# Altium PCB NumatoShieldWithVias.PcbDoc (part 1 of 4)
Units mil, origin at the board's own origin, x right, y up, seen from the top; angles counter-clockwise.
Board outline 5000 x 5000 mil, 4 copper layers (Top Layer, Mid-Layer 1, Mid-Layer 2, Bottom Layer); 8 components, 163 nets, 352 pads, 43 vias.
Unrouted connection lines stored in the file: 11.
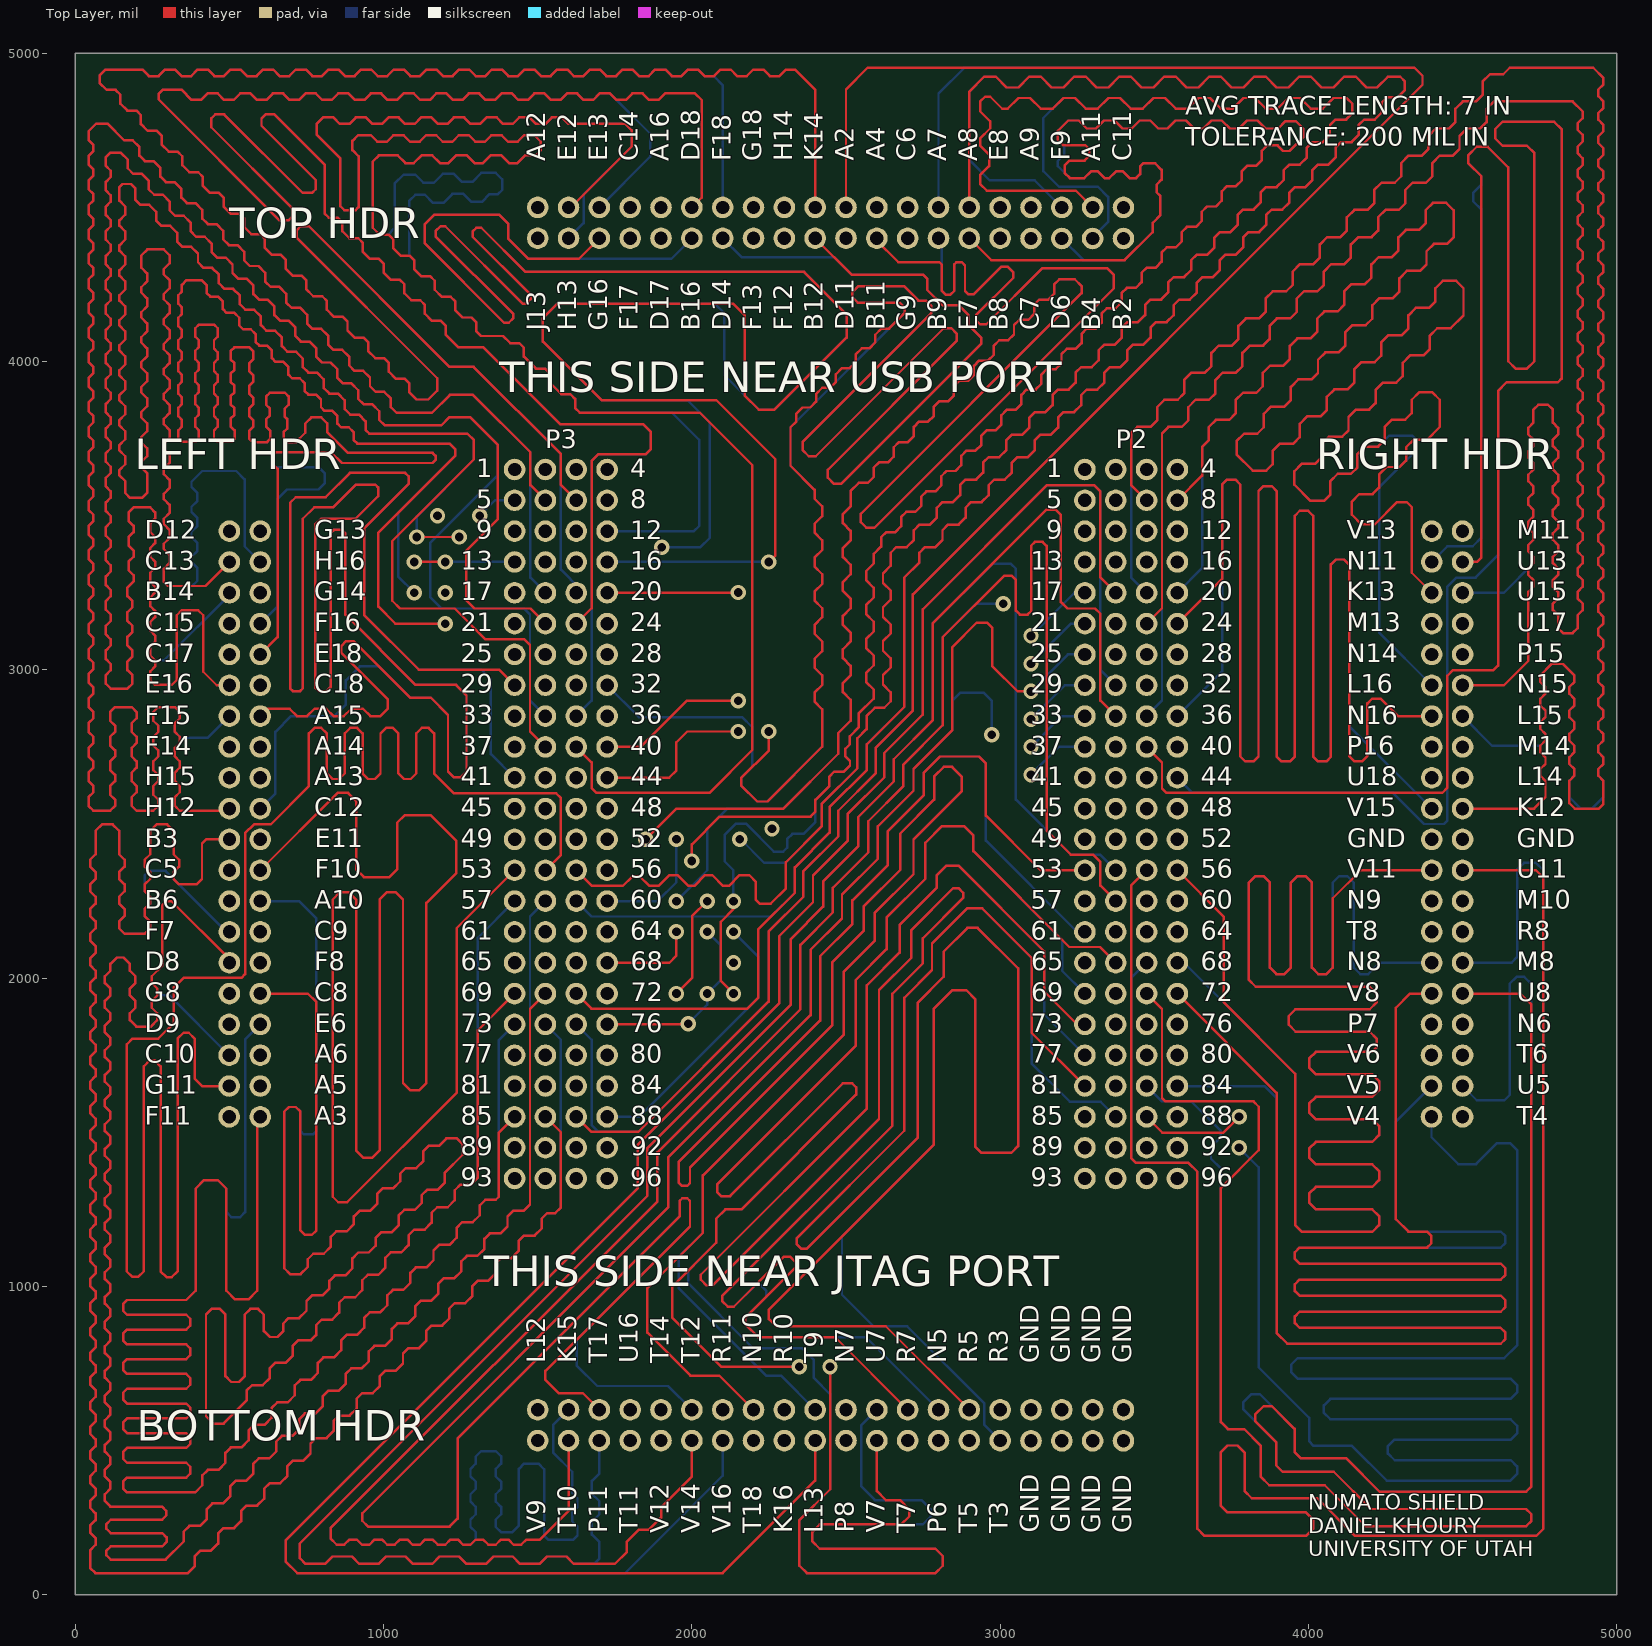
[diagram p0: Top Layer view]
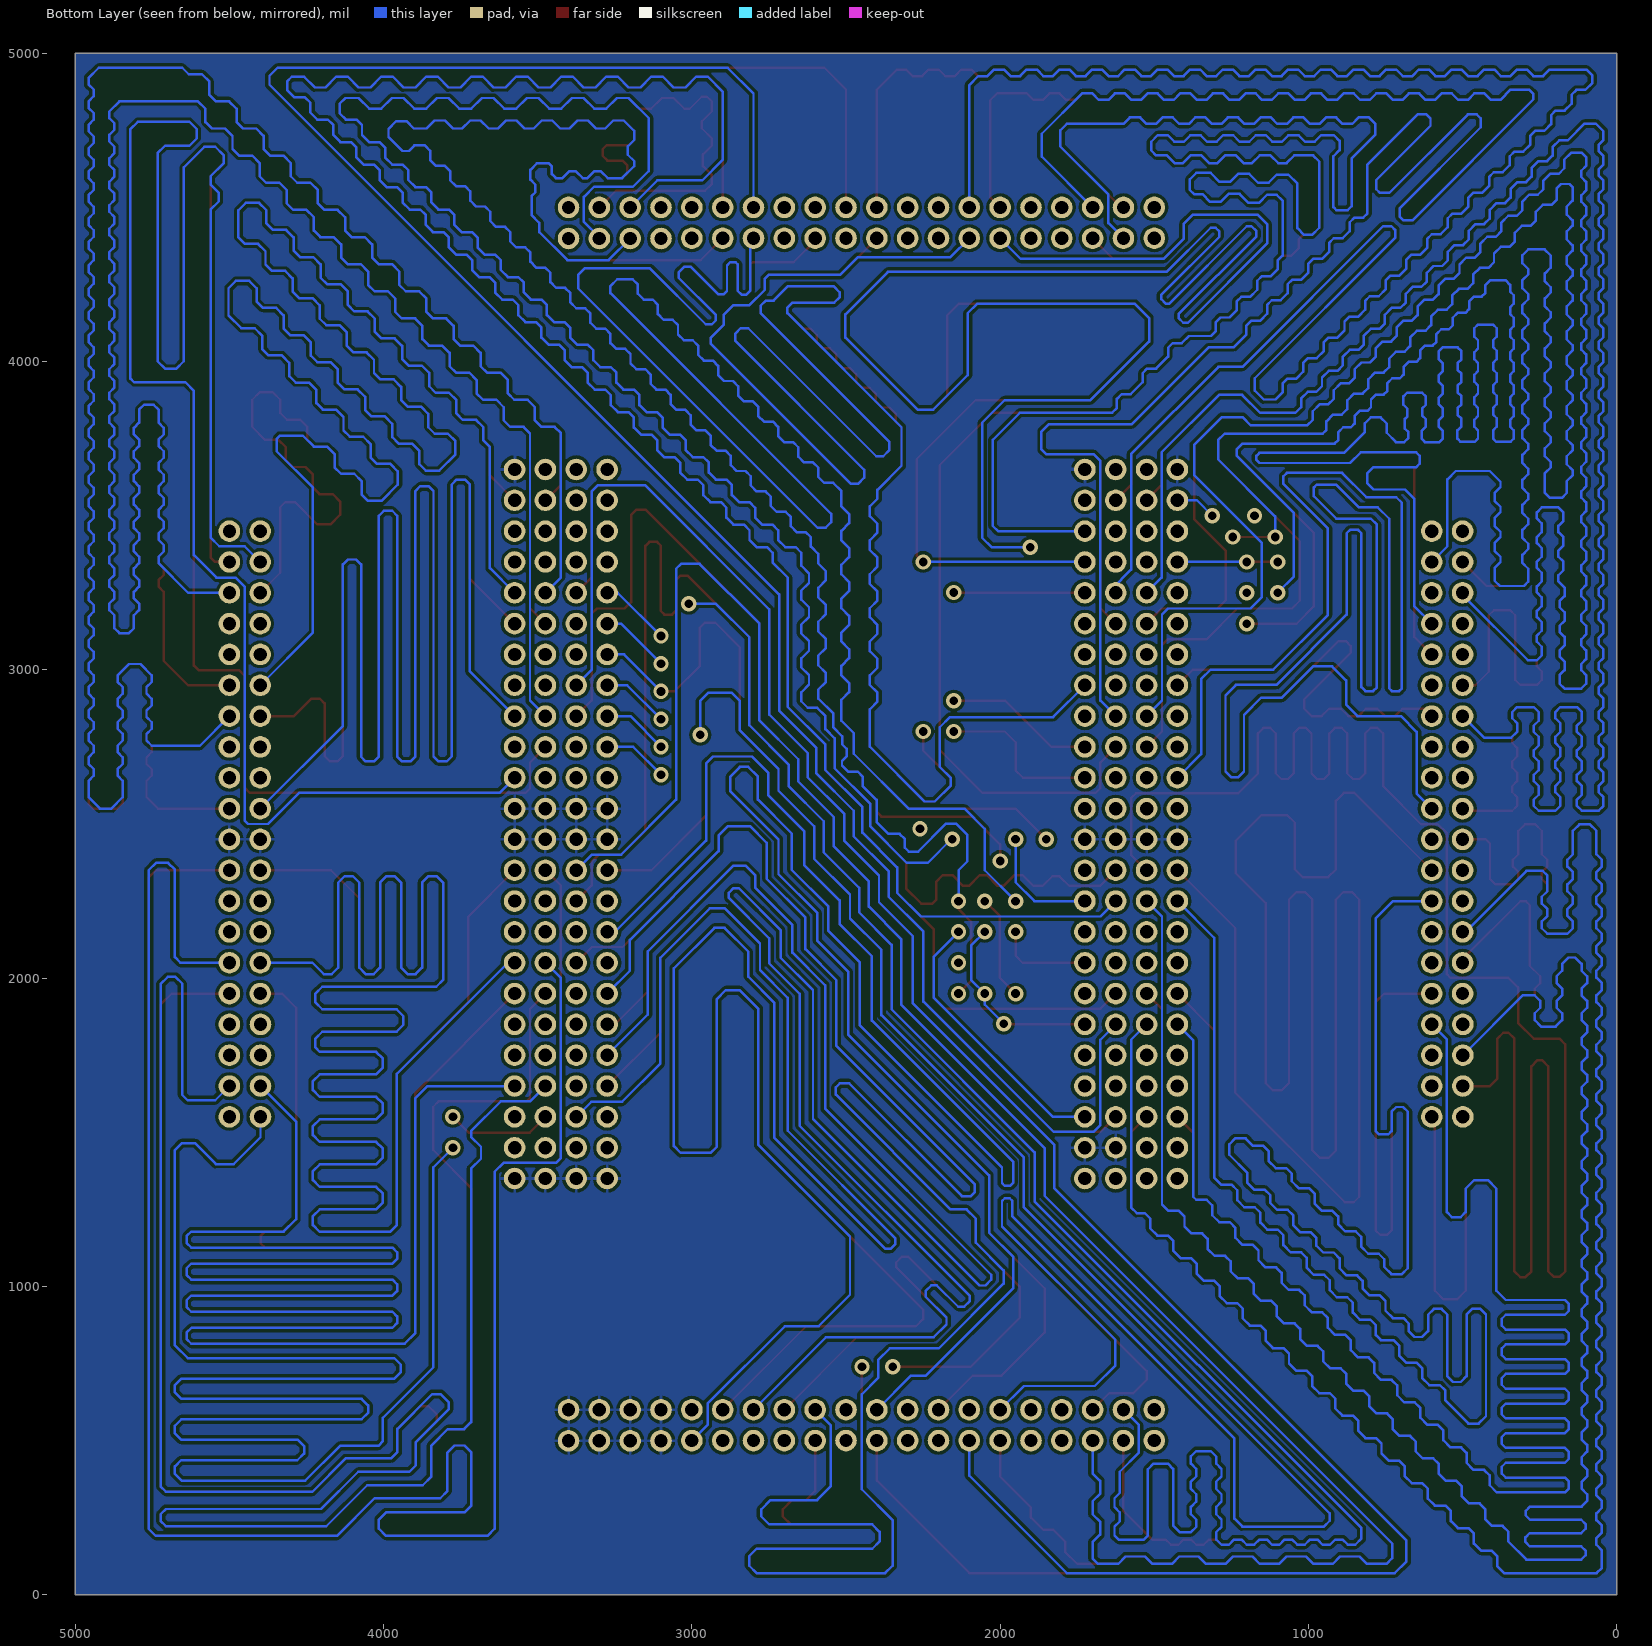
[diagram p1: Bottom Layer view, seen from below]
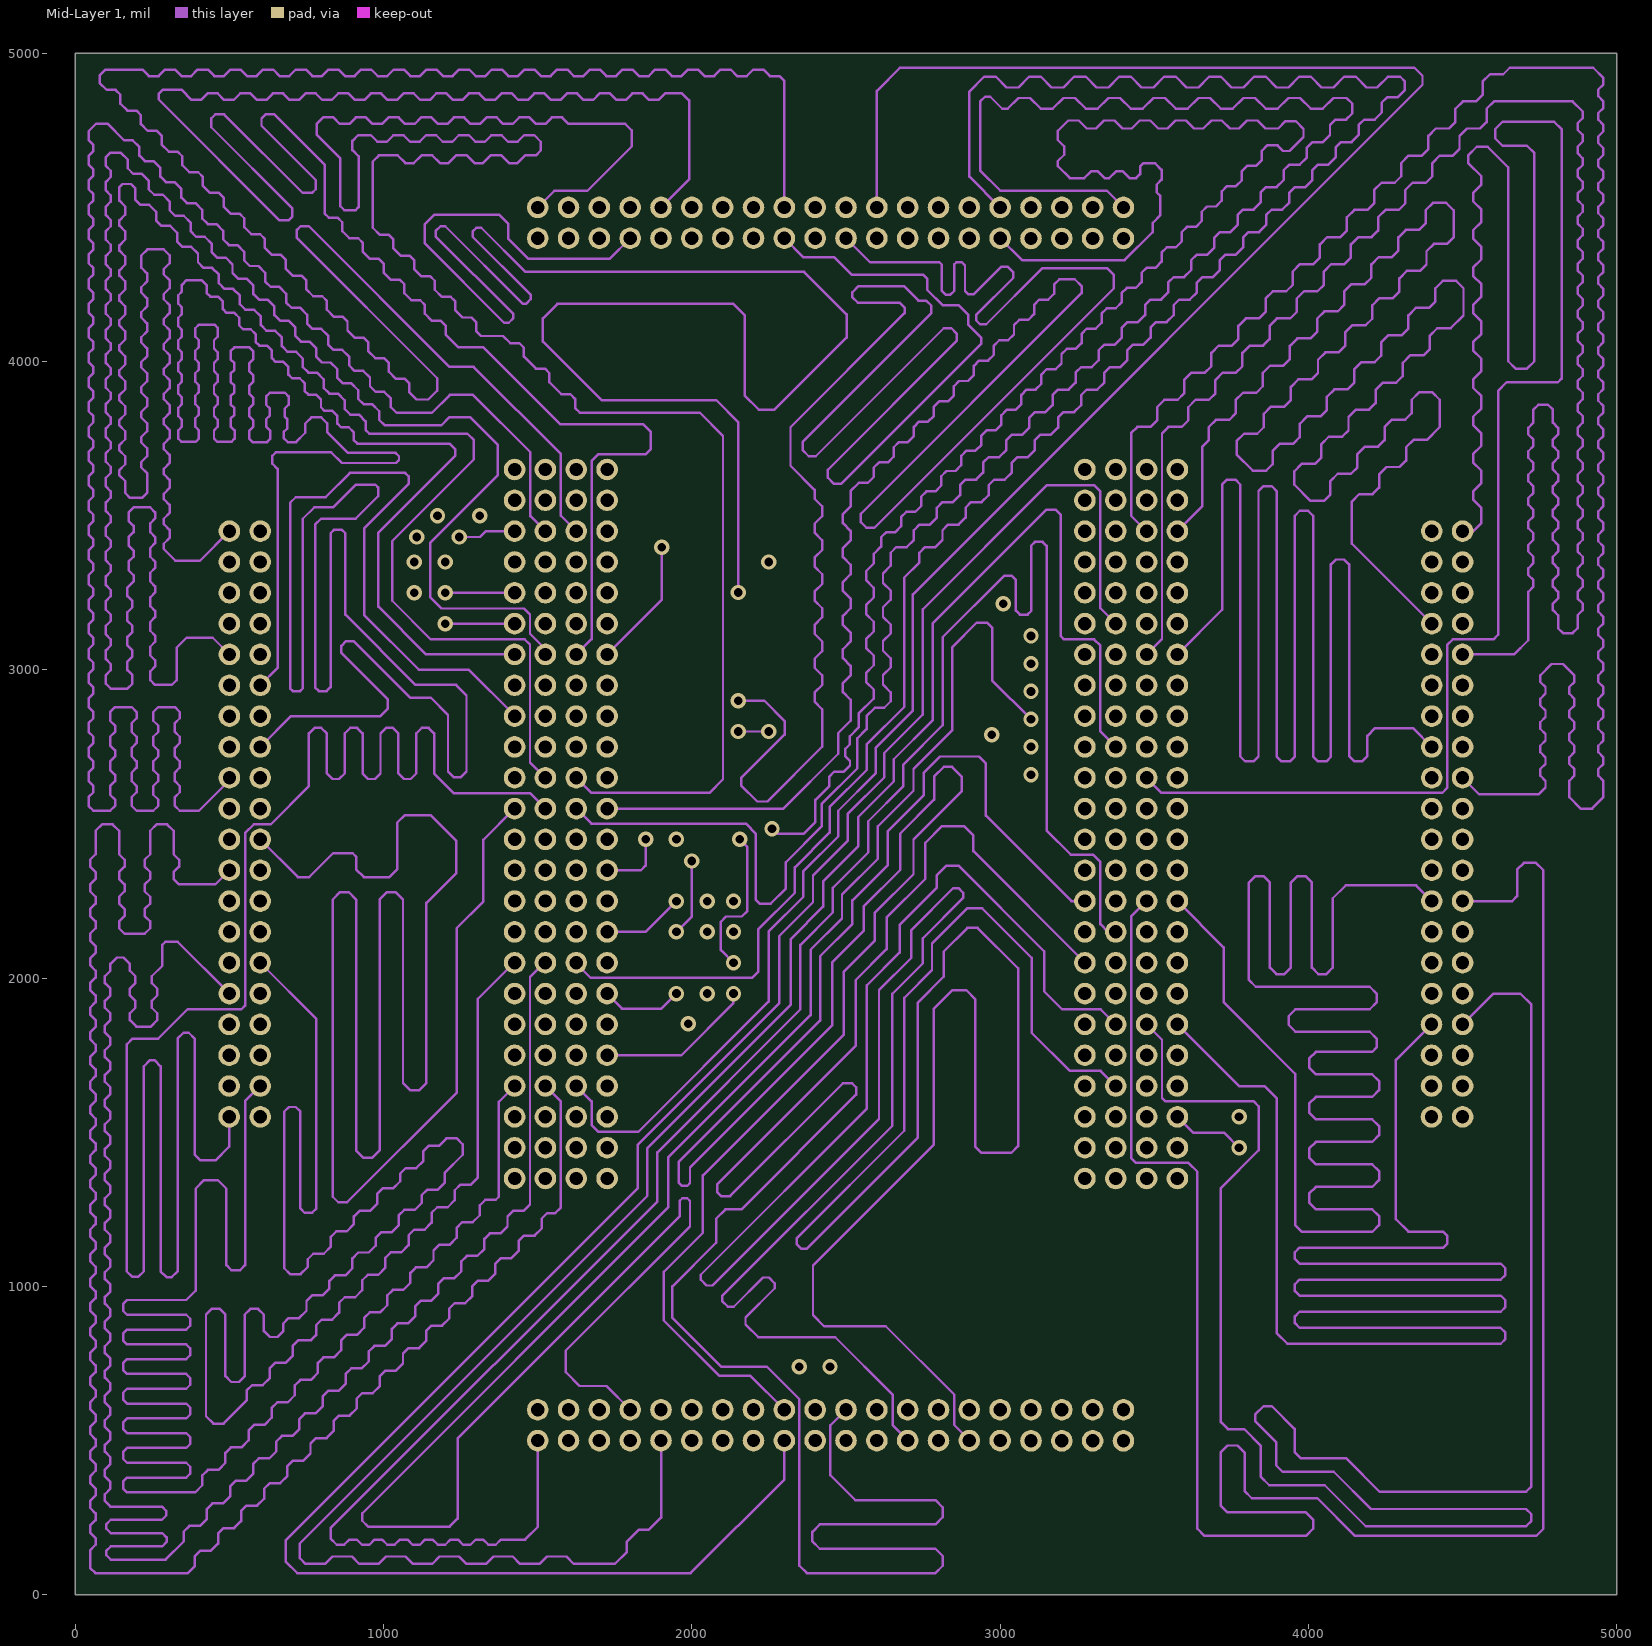
[diagram p2: Mid-Layer 1]
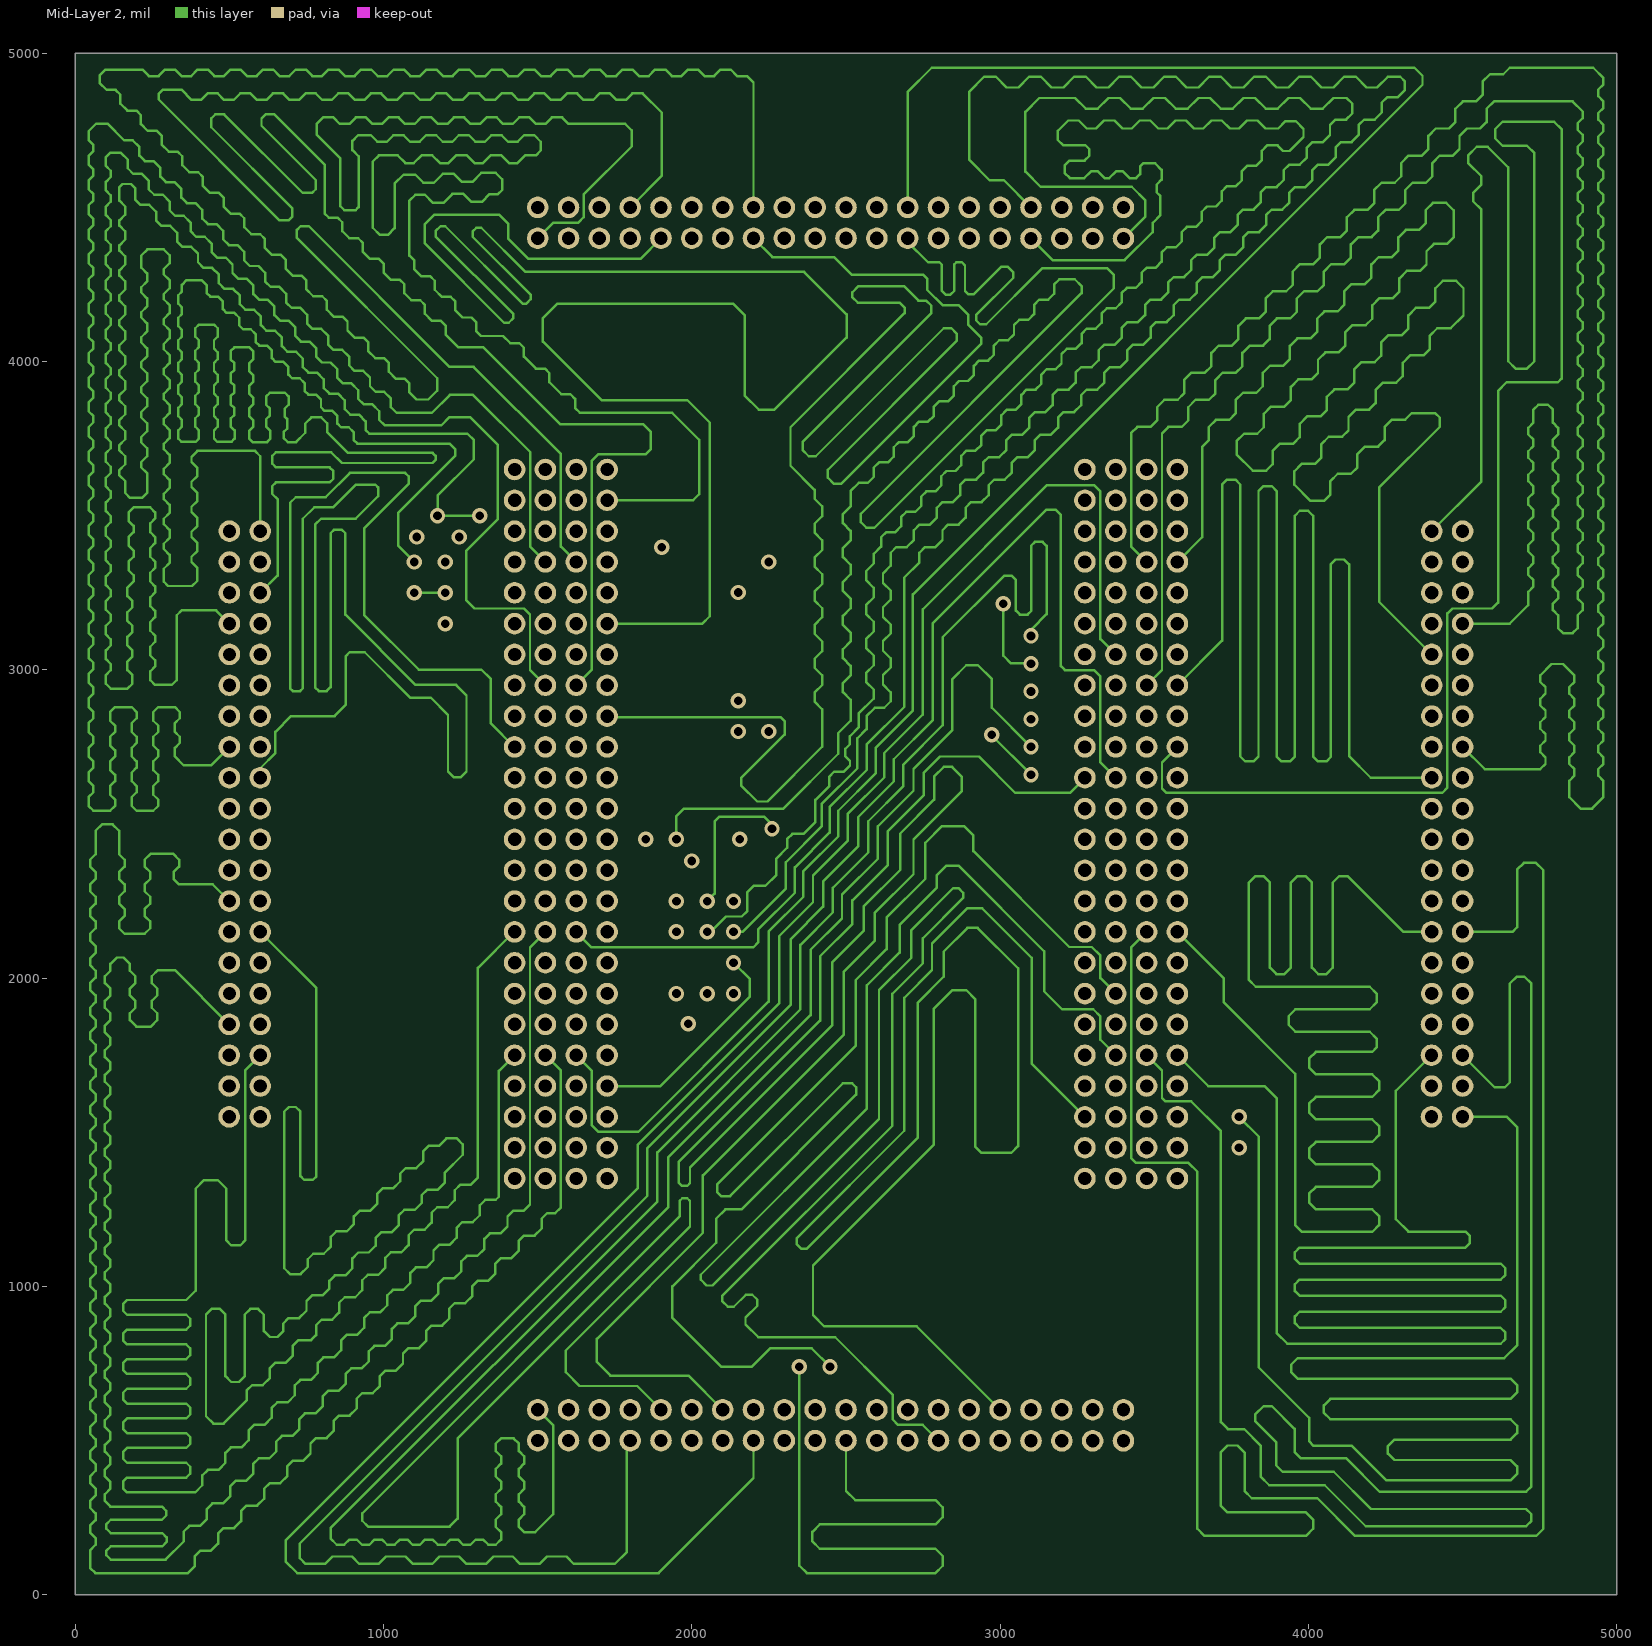
[diagram p3: Mid-Layer 2]

## Layer stack, top to bottom
Top Solder: solder mask 0.4, Solder Resist, Dk 3.5
Top Layer: signal copper 1.4
Dielectric 1: dielectric 12.6, FR-4, Dk 4.8
Mid-Layer 1: signal copper 1.4
Dielectric2: dielectric 12.6, FR-4, Dk 4.8
Mid-Layer 2: signal copper 1.4
Dielectric3: dielectric 12.6, FR-4, Dk 4.8
Bottom Layer: signal copper 1.4
Bottom Solder: solder mask 0.4, Solder Resist, Dk 3.5

## Board outline
0,0 5000,0 5000,5000 0,5000

## Design rules (kind name [scope] priority, off if disabled: settings)
Clearance [All] p1: gap=10
HoleSize [All] p1: absolutevalues=TRUE maxlimit=100 minlimit=10 maxpercent=80.000 minpercent=20.000
MatchedLengths [All] p1: tolerance=200 checknetsindiffpair=TRUE checkdiffpairvsdiffpair=TRUE checkothers=TRUE
MinimumAnnularRing [All] p1: minimumring=10
PolygonConnect [All] p1: connectstyle=Relief reliefconductorwidth=10 reliefentries=4 polygonreliefangle="90 Angle" airgapwidth=10
RoutingVias [All] p1: holewidth=25 width=40 viastyle="Through Hole" minholewidth=28 minwidth=50 maxholewidth=28 maxwidth=50
SolderMaskExpansion [All] p1: expansion=4
Width [All] p1: maxlimit=20 minlimit=7 preferedwidth=7 minimp=50.000000 maximp=50.000000 favimp=50.000000
28 further rules are at their usual default settings.

## Classes and differential pairs
component class NumatoShield: "BOTTOM HDR" "LEFT HDR" P2 P3 "RIGHT HDR" "TOP HDR" ""

## Components (designator, comment, footprint, x,y, rotation, side; value= is the part's Value field where it differs from the comment)
"BOTTOM HDR" "71918-240LF" HWL_FP 1500,500 r0 top (schematic designator HWL3)
H2 "HEADER2X48" H_FP 1725,1350 r90 top
H4 "HEADER2X48" H_FP 3575,1350 r90 top
"LEFT HDR" "71918-240LF" HWL_FP 500,3450 r270 top (schematic designator HWL1)
P2 "HEADER2X48" H_FP 3375,1350 r90 top (schematic designator H3)
P3 "HEADER2X48" H_FP 1525,1350 r90 top (schematic designator H1)
"RIGHT HDR" "71918-240LF" HWL_FP 4400,3450 r270 top (schematic designator HWL4)
"TOP HDR" "71918-240LF" HWL_FP 1500,4400 r0 top (schematic designator HWL2)

## Footprints (in the part's own frame and the unit in brackets; to place one, negate y for a bottom-side part, rotate by r counter-clockwise, add the part's x,y. Pads: shape width x height; smd on the part's side, far side on the other; paste and mask are expansions set on the pad)
H_FP [mil]
  round 70 hole 43.31: 1(0,0) 2(0,100) 3(100,0) 4(100,100) 5(200,0) 6(200,100) 7(300,0) 8(300,100) 9(400,0) 10(400,100) 11(500,0) 12(500,100) 13(600,0) 14(600,100) 15(700,0) 16(700,100) 17(800,0) 18(800,100) 19(900,0) 20(900,100) 21(1000,0) 22(1000,100) 23(1100,0) 24(1100,100) 25(1200,0) 26(1200,100) 27(1300,0) 28(1300,100) 29(1400,0) 30(1400,100) 31(1500,0) 32(1500,100) 33(1600,0) 34(1600,100) 35(1700,0) 36(1700,100) 37(1800,0) 38(1800,100) 39(1900,0) 40(1900,100) 41(2000,0) 42(2000,100) 43(2100,0) 44(2100,100) 45(2200,0) 46(2200,100) 47(2300,0) 48(2300,100)
HWL_FP [mil]
  round 70 hole 43.31: 0(0,0) 1(100,0) 2(200,0) 3(300,0) 4(400,0) 5(500,0) 6(600,0) 7(700,0) 8(800,0) 9(900,0) 10(1000,0) 11(1100,0) 12(1200,0) 13(1300,0) 14(1400,0) 15(1500,0) 16(1600,-0.83) 17(1700,-0.83) 18(1800,-0.83) 19(1900,-0.83) 20(1900,100) 21(1800,100) 22(1700,100) 23(1600,100) 24(1500,100) 25(1400,100) 26(1300,100) 27(1200,100) 28(1100,100) 29(1000,100) 30(900,100) 31(800,100) 32(700,100) 33(600,100) 34(500,100) 35(400,100) 36(300,100) 37(200,100) 38(100,100) 39(0,100)

## Part data
"BOTTOM HDR" "LEFT HDR" "RIGHT HDR" "TOP HDR": "CONN HEADER 40POS DUAL VERT PCB"

## Via types
v1: diameter 50, hole 28, Top Layer to Bottom Layer, 43 vias

## Nets (pads, with @x,y where several pads share a name; then routed paths per layer and width w, separated by ;. In a path a pad name is that pad's centre, name@x,y a point inside that pad or via, vN(x,y) a via of type N, cw(c..) or ccw(c..) an arc to the next point about the centre after c; other vN are vias at no path point)
3V3: H2.1 H2.2 H4.3 H4.48 P2.3 P3.1 P3.2 P3.47
A2: "TOP HDR.29" H2.6 | length 6993.8
  Top Layer w8: H2.6@1625,1550 1674,1501 1826,1501 2249,1924 2249,2151 2362,2264 2362,2347 2475,2460 2475,2543 2596,2664 2596,2747 2717,2868 2717,3245 4370,4898 4370,4927 4344,4953 2570,4953 2500,4883 2500,4500
A3: "LEFT HDR.20" P3.6 | length 6901.9
  Top Layer w8: 590,1550 590,986 562,958 518,958 490,986 490,1317 462,1345 418,1345 390,1317 390,986 360,956 168,956 155,943 155,921 168,908 360,908 373,895 373,873 360,860 168,860 155,847 155,825 168,812 360,812 373,799 373,777 360,764 168,764 155,751 155,729 168,716 360,716 373,703 373,681 360,668 168,668 155,655 155,633 168,620 360,620 373,607 373,585 360,572 168,572 155,559 155,537 168,524 360,524 373,511 373,489 360,476 168,476 155,463 155,441 168,428 360,428 373,415 373,393 360,380 168,380 155,367 155,345 168,332 389,332 412,355 412,387 430,405 464,405 487,428 487,460 505,478 539,478 562,501 562,533 580,551 614,551 637,574 637,606 655,624 689,624 712,647 712,679 730,697 764,697 787,720 787,752 805,770 839,770 862,793 862,825 880,843 914,843 937,866 937,898 955,916 989,916 1012,939 1012,971 1030,989 1064,989 1087,1012 1087,1044 1105,1062 1139,1062 1162,1085 1162,1117 1180,1135 1214,1135 1237,1158 1237,1190 1255,1208 1289,1208 1312,1231 1312,1263 1330,1281 1364,1281 1374,1291 1374,1499 P3.6@1425,1550
A4: "TOP HDR.28" H2.8 | length 6977.4
  Mid-Layer 1 w8: H2.8@1625,1650 1675,1600 1675,1523 1697,1501 1826,1501 2249,1924 2249,2151 2362,2264 2362,2347 2475,2460 2475,2543 2596,2664 2596,2747 2717,2868 2717,3245 4370,4898 4370,4927 4344,4953 2675,4953 2600,4878 2600,4500
A5: "LEFT HDR.21" P3.8 | length 6907.2
  Mid-Layer 1 w8: 600,1650 551,1601 551,1069 535,1053 506,1053 490,1069 490,1317 462,1345 418,1345 390,1317 390,986 360,956 168,956 155,943 155,921 168,908 360,908 373,895 373,873 360,860 168,860 155,847 155,825 168,812 360,812 373,799 373,777 360,764 168,764 155,751 155,729 168,716 360,716 373,703 373,681 360,668 168,668 155,655 155,633 168,620 360,620 373,607 373,585 360,572 168,572 155,559 155,537 168,524 360,524 373,511 373,489 360,476 168,476 155,463 155,441 168,428 360,428 373,415 373,393 360,380 168,380 155,367 155,345 168,332 389,332 412,355 412,387 430,405 464,405 487,428 487,460 505,478 539,478 562,501 562,533 580,551 614,551 637,574 637,606 655,624 689,624 712,647 712,679 730,697 764,697 787,720 787,752 805,770 839,770 862,793 862,825 880,843 914,843 937,866 937,898 955,916 989,916 1012,939 1012,971 1030,989 1064,989 1087,1012 1087,1044 1105,1062 1139,1062 1162,1085 1162,1117 1180,1135 1214,1135 1237,1158 1237,1190 1255,1208 1289,1208 1312,1231 1312,1263 1330,1281 1364,1281 1374,1291 1374,1599 P3.8@1425,1650
A6: "LEFT HDR.22" P3.10 | length 6947.2
  Mid-Layer 2 w8: 600,1750 551,1701 551,1149 535,1133 506,1133 490,1149 490,1317 462,1345 418,1345 390,1317 390,986 360,956 168,956 155,943 155,921 168,908 360,908 373,895 373,873 360,860 168,860 155,847 155,825 168,812 360,812 373,799 373,777 360,764 168,764 155,751 155,729 168,716 360,716 373,703 373,681 360,668 168,668 155,655 155,633 168,620 360,620 373,607 373,585 360,572 168,572 155,559 155,537 168,524 360,524 373,511 373,489 360,476 168,476 155,463 155,441 168,428 360,428 373,415 373,393 360,380 168,380 155,367 155,345 168,332 389,332 412,355 412,387 430,405 464,405 487,428 487,460 505,478 539,478 562,501 562,533 580,551 614,551 637,574 637,606 655,624 689,624 712,647 712,679 730,697 764,697 787,720 787,752 805,770 839,770 862,793 862,825 880,843 914,843 937,866 937,898 955,916 989,916 1012,939 1012,971 1030,989 1064,989 1087,1012 1087,1044 1105,1062 1139,1062 1162,1085 1162,1117 1180,1135 1214,1135 1237,1158 1237,1190 1255,1208 1289,1208 1312,1231 1312,1263 1330,1281 1364,1281 1374,1291 1374,1699 P3.10@1425,1750
A7: "TOP HDR.26" H2.12 | length 6972.1
  Bottom Layer w8: H2.12@1625,1850 1675,1800 1675,1523 1697,1501 1826,1501 2249,1924 2249,2151 2362,2264 2362,2347 2475,2460 2475,2543 2596,2664 2596,2747 2717,2868 2717,3245 4370,4898 4370,4927 4344,4953 2884,4953 2800,4869 2800,4500
A8: "TOP HDR.25" H2.14 | length 6961.1
  Top Layer w8: H2.14@1625,1950 1674,1901 2180,1901 2216,1937 2216,2159 2334,2277 2334,2359 2447,2472 2447,2554.6 2568,2675.6 2568,2758.6 2689,2879.6 2689,3299 2738,3348 2738,3380 2756,3398 2790,3398 2813,3421 2813,3453 2831,3471 2865,3471 2888,3494 2888,3526 2906,3544 2940,3544 2963,3567 2963,3599 2981,3617 3015,3617 3038,3640 3038,3672 3056,3690 3090,3690 3113,3713 3113,3745 3131,3763 3165,3763 3188,3786 3188,3818 3206,3836 3240,3836 3263,3859 3263,3891 3281,3909 3315,3909 3338,3932 3338,3964 3356,3982 3390,3982 3413,4005 3413,4037 3431,4055 3465,4055 3488,4078 3488,4110 3506,4128 3540,4128 3563,4151 3563,4183 3581,4201 3615,4201 3638,4224 3638,4256 3656,4274 3690,4274 3713,4297 3713,4329 3731,4347 3765,4347 3788,4370 3788,4402 3806,4420 3840,4420 3863,4443 3863,4475 3881,4493 3915,4493 3938,4516 3938,4548 3956,4566 3990,4566 4013,4589 4013,4621 4031,4639 4065,4639 4088,4662 4088,4694 4106,4712 4140,4712 4163,4735 4163,4767 4181,4785 4215,4785 4238,4808 4238,4840 4256,4858 4290,4858 4313,4881 4313,4909 4298,4924 4258,4924 4223,4889 4189,4889 4154,4924 4116,4924 4081,4889 4043,4889 4008,4924 3970,4924 3935,4889 3897,4889 3862,4924 3824,4924 3789,4889 3751,4889 3716,4924 3678,4924 3643,4889 3605,4889 3570,4924 3532,4924 3497,4889 3459,4889 3424,4924 3386,4924 3351,4889 3313,4889 3278,4924 3240,4924 3205,4889 3167,4889 3132,4924 3094,4924 3059,4889 3021,4889 2986,4924 2948,4924 2900,4876 2900,4500
A9: "TOP HDR.23" H2.18 | length 6883.4
  Mid-Layer 2 w8: H2.18@1625,2150 1675,2100 2199,2100 2216,2117 2216,2159 2334,2277 2334,2359 2447,2472 2447,2555 2568,2676 2568,2759 2689,2880 2689,3299 2738,3348 2738,3380 2756,3398 2790,3398 2813,3421 2813,3453 2831,3471 2865,3471 2888,3494 2888,3526 2906,3544 2940,3544 2963,3567 2963,3599 2981,3617 3015,3617 3038,3640 3038,3672 3056,3690 3090,3690 3113,3713 3113,3745 3131,3763 3165,3763 3188,3786 3188,3818 3206,3836 3240,3836 3263,3859 3263,3891 3281,3909 3315,3909 3338,3932 3338,3964 3356,3982 3390,3982 3413,4005 3413,4037 3431,4055 3465,4055 3488,4078 3488,4110 3506,4128 3540,4128 3563,4151 3563,4183 3581,4201 3615,4201 3638,4224 3638,4256 3656,4274 3690,4274 3713,4297 3713,4329 3731,4347 3765,4347 3788,4370 3788,4402 3806,4420 3840,4420 3863,4443 3863,4475 3881,4493 3915,4493 3938,4516 3938,4548 3956,4566 3990,4566 4013,4589 4013,4621 4031,4639 4065,4639 4088,4662 4088,4694 4106,4712 4140,4712 4163,4735 4163,4767 4181,4785 4215,4785 4238,4808 4238,4840 4256,4858 4290,4858 4313,4881 4313,4909 4298,4924 4258,4924 4223,4889 4189,4889 4154,4924 4116,4924 4081,4889 4043,4889 4008,4924 3970,4924 3935,4889 3897,4889 3862,4924 3824,4924 3789,4889 3751,4889 3716,4924 3678,4924 3643,4889 3605,4889 3570,4924 3532,4924 3497,4889 3459,4889 3424,4924 3386,4924 3351,4889 3313,4889 3278,4924 3240,4924 3205,4889 3167,4889 3132,4924 3094,4924 3059,4889 3021,4889 2986,4924 2948,4924 2900,4876 2900,4654 2966,4588 3012,4588 3100,4500
A10: "LEFT HDR.27" P3.20 | length 6908.2
  Bottom Layer w8: 600,2250 726,2250 782,2194 782,1504 771,1493 741,1493 730,1504 730,1567 715,1582 693,1582 678,1567 678,1059 697,1040 731,1040 754,1063 754,1088 772,1106 806,1106 829,1129 829,1161 847,1179 881,1179 904,1202 904,1227 922,1245 956,1245 979,1268 979,1300 997,1318 1031,1318 1054,1341 1054,1366 1072,1384 1106,1384 1129,1407 1129,1439 1147,1457 1181,1457 1204,1480 1238,1480 1257,1461 1257,1427 1199,1369 1199,1337 1176,1314 1142,1314 1124,1296 1124,1271 1101,1248 1067,1248 1049,1230 1049,1198 1026,1175 992,1175 974,1157 974,1132 952,1110 918,1110 899,1091 899,1059 876,1036 842,1036 824,1018 824,993 802,971 768,971 750,953 750,921 726,897 692,897 674,879 674,854 656,836 631,836 612,855 612,908 593,927 568,927 549,908 549,708 531,690 506,690 487,709 487,909 468,928 443,928 424,909 424,579 448,555 481,555 556,630 556,662 574,680 608,680 631,703 631,735 649,753 683,753 706,776 706,808 724,826 765,826 781,842 781,874 799,892 833,892 856,915 856,947 874,965 908,965 931,988 931,1020 949,1038 983,1038 1006,1061 1006,1093 1024,1111 1058,1111 1081,1134 1081,1166 1099,1184 1133,1184 1156,1207 1156,1239 1174,1257 1208,1257 1231,1280 1231,1312 1249,1330 1283,1330 1306,1353 1306,2131 P3.20@1425,2250
A11: "TOP HDR.21" H2.22 | length 6866.9
  Top Layer w8: H2.22@1625,2350 1676,2299 1776,2299 1807,2330 1831,2330 1862,2299 1892,2299 1927,2334 1954,2334 1989,2299 2008,2299 2043,2334 2066,2334 2101,2299 2120,2299 2155,2334 2186,2334 2208,2312 2208,2254 2220,2242 2256,2242 2305,2291 2305,2376 2422,2493 2422,2566 2537,2681 2537,2778 2567,2808 2567,2850 2594,2877 2624,2877 2645,2898 2645,2927 2620,2952 2620,2983 2645,3008 2645,3037 2620,3062 2620,3093 2645,3118 2645,3147 2620,3172 2620,3203 2645,3228 2645,3257 2620,3282 2620,3313 2645,3338 2645,3380 2663,3398 2697,3398 2720,3421 2720,3453 2738,3471 2772,3471 2795,3494 2795,3526 2813,3544 2847,3544 2870,3567 2870,3599 2888,3617 2922,3617 2945,3640 2945,3672 2963,3690 2997,3690 3020,3713 3020,3745 3038,3763 3072,3763 3095,3786 3095,3818 3113,3836 3147,3836 3170,3859 3170,3891 3188,3909 3222,3909 3245,3932 3245,3964 3263,3982 3297,3982 3320,4005 3320,4037 3338,4055 3372,4055 3395,4078 3395,4110 3413,4128 3447,4128 3470,4151 3470,4183 3488,4201 3522,4201 3545,4224 3545,4256 3563,4274 3597,4274 3620,4297 3620,4329 3638,4347 3672,4347 3695,4370 3695,4402 3713,4420 3747,4420 3770,4443 3770,4475 3788,4493 3822,4493 3845,4516 3845,4548 3863,4566 3897,4566 3920,4589 3920,4621 3938,4639 3972,4639 3995,4662 3995,4694 4013,4712 4047,4712 4070,4735 4070,4767 4088,4785 4122,4785 4142,4805 4142,4837 4124,4855 4081,4855 4046,4820 4008,4820 3973,4855 3935,4855 3900,4820 3862,4820 3827,4855 3789,4855 3754,4820 3716,4820 3681,4855 3643,4855 3608,4820 3570,4820 3535,4855 3497,4855 3462,4820 3424,4820 3389,4855 3351,4855 3316,4820 3278,4820 3243,4855 3205,4855 3170,4820 3132,4820 3097,4855 3059,4855 3024,4820 3007,4820 2968,4859 2951,4859 2935,4843 2935,4812 2968,4779 2968,4757 2935,4724 2935,4701 2964,4672 2964,4634 2935,4605 2935,4576 2957,4554 3246,4554 3300,4500
A12: "TOP HDR.39" H2.28 | length 6978.1
  Mid-Layer 1 w8: 1500,4500 1554,4554 1661,4554 1805,4698 1805,4750 1784,4771 1600,4771 1579,4792 1546,4792 1525,4771 1494,4771 1473,4792 1440,4792 1419,4771 1388,4771 1367,4792 1334,4792 1313,4771 1282,4771 1261,4792 1228,4792 1207,4771 1176,4771 1155,4792 1122,4792 1101,4771 1070,4771 1049,4792 1016,4792 995,4771 964,4771 943,4792 910,4792 889,4771 858,4771 837,4792 804,4792 783,4771 783,4736 860,4659 860,4504 873,4491 909,4491 919,4501 919,4666 899,4686 899,4716 917,4734 959,4734 980,4713 1011,4713 1032,4734 1065,4734 1086,4713 1117,4713 1138,4734 1171,4734 1192,4713 1223,4713 1244,4734 1277,4734 1298,4713 1329,4713 1350,4734 1383,4734 1404,4713 1435,4713 1456,4734 1489,4734 1510,4713 1510,4685 1494,4669 1459,4669 1434,4644 1407,4644 1382,4669 1347,4669 1322,4644 1295,4644 1270,4669 1235,4669 1210,4644 1183,4644 1158,4669 1123,4669 1098,4644 1071,4644 1046,4669 985,4669 965,4649 965,4434 988,4411 1017,4411 1032,4396 1032,4367 1055,4344 1084,4344 1099,4329 1099,4300 1122,4277 1151,4277 1166,4262 1166,4233 1189,4210 1218,4210 1233,4195 1233,4166 1256,4143 1285,4143 1300,4128 1300,4099 1316,4083 1388,4083 1411,4060 1440,4060 1455,4045 1455,4016 1494,3977 1523,3977 1538,3962 1538,3933 1577,3894 1606,3894 1621,3879 1621,3850 1637,3834 2026,3834 2101,3759 2101,2645 2057,2601 1674,2601 H2.28@1626,2649
A13: "LEFT HDR.31" P3.30 | length 6882.8
  Mid-Layer 2 w8: 600,2650 600,2680.7 649,2729.7 649,2799 700,2850 841,2850 878,2887 878,3045 890,3057 939,3057 1086,2910 1153,2910 1209,2854 1209,2670 1228,2651 1250,2651 1269,2670 1269,2917 1235,2951 1104,2951 876,3179 876,3443 865,3454 839,3454 828,3443 828,2944 815,2931 790,2931 778,2943 778,3471 797,3490 909,3490 982,3563 982,3592 973,3601 910,3601 836,3527 775,3527 738,3490 738,2940 729,2931 706,2931 697,2940 697,3542 715,3560 812,3560 891,3639 1070,3639 1081,3628 1081,3603 937,3459 937,3178 1114,3001 1317,3001 1348,2970 1348,2826 1424,2750 P3.30@1425,2750
A14: "LEFT HDR.32" P3.32 | length 6928.5
  Mid-Layer 1 w8: 600,2750 700,2850 990,2850 1013,2873 1013,2905 863,3055 863,3078 878,3093 903,3093 1086,2910 1153,2910 1209,2854 1209,2670 1228,2651 1250,2651 1269,2670 1269,2917 1235,2951 1104,2951 876,3179 876,3443 865,3454 839,3454 828,3443 828,2944 815,2931 790,2931 778,2943 778,3471 797,3490 909,3490 982,3563 982,3592 973,3601 910,3601 836,3527 775,3527 738,3490 738,2940 729,2931 706,2931 697,2940 697,3542 715,3560 812,3560 891,3639 1070,3639 1081,3628 1081,3603 937,3459 937,3178 1114,3001 1276,3001 1426,2851 P3.32@1427,2850
A15: "LEFT HDR.33" P3.34 | length 6903.3
  Top Layer w8: 600,2850 624,2874 695,2874 719,2850 752,2850 776,2874 814,2874 838,2850 871,2850 895,2874 933,2874 957,2850 990,2850 1013,2873 1013,2905 863,3055 863,3078 878,3093 903,3093 1086,2910 1153,2910 1209,2854 1209,2670 1228,2651 1250,2651 1269,2670 1269,2917 1235,2951 1104,2951 876,3179 876,3443 865,3454 839,3454 828,3443 828,2944 815,2931 790,2931 778,2943 778,3471 797,3490 909,3490 982,3563 982,3592 973,3601 910,3601 836,3527 775,3527 738,3490 738,2940 729,2931 706,2931 697,2940 697,3542 715,3560 812,3560 891,3639 1070,3639 1081,3628 1081,3603 937,3459 937,3178 1114,3001 1374,3001 P3.34@1425,2950
A16: "TOP HDR.35" H2.36 | length 6994.1
  Mid-Layer 1 w8: H2.36@1625,3050 1675,3100 1675,3678 1696,3699 1850,3699 1866,3715 1866,3773 1842,3797 1572.3,3797 1322.3,4047 1242,4047 1201,4088 1201,4117 1186,4132 1157,4132 1134,4155 1134,4184 1119,4199 1090,4199 1067,4222 1067,4251 1052,4266 1023,4266 1000,4289 1000,4318 985,4333 956,4333 933,4356 933,4385 918,4400 889,4400 866,4423 866,4452 851,4467 822,4467 809,4480 809,4639 645,4803 618,4803 604,4789 604,4765 780,4589 780,4559 768,4547 738,4547 483,4802 454,4802 441,4789 441,4760 704,4497 704,4470 692,4458 663,4458 270,4851 270,4868 284,4882 344,4882 377,4849 408,4849 429,4870 462,4870 483,4849 514,4849 535,4870 568,4870 589,4849 620,4849 641,4870 674,4870 695,4849 726,4849 747,4870 780,4870 801,4849 832,4849 853,4870 886,4870 907,4849 938,4849 959,4870 992,4870 1013,4849 1044,4849 1065,4870 1098,4870 1119,4849 1150,4849 1171,4870 1204,4870 1225,4849 1256,4849 1277,4870 1310,4870 1331,4849 1362,4849 1383,4870 1416,4870 1437,4849 1468,4849 1489,4870 1522,4870 1543,4849 1574,4849 1595,4870 1628,4870 1649,4849 1680,4849 1701,4870 1734,4870 1755,4849 1786,4849 1807,4870 1840,4870 1861,4849 1892,4849 1913,4870 1968,4870 1991,4847 1991,4591 1900,4500
ACBUS0: P2.48
ACBUS1: P2.47
ACBUS2: P2.46
ACBUS3: P2.45
ACBUS4: P2.44
ACBUS5: P2.43
ACBUS6: P2.42
ACBUS7: P2.41
B2: "TOP HDR.19" H2.5 | length 6966.7
  Mid-Layer 2 w8: v1(2135,2150) 2164,2150 2305,2291 2305,2376 2422,2493 2422,2566 2537,2681 2537,2778 2567,2808 2567,2850 2594,2877 2624,2877 2645,2898 2645,2927 2620,2952 2620,2983 2645,3008 2645,3037 2620,3062 2620,3093 2645,3118 2645,3147 2620,3172 2620,3203 2645,3228 2645,3257 2620,3282 2620,3313 2645,3338 2645,3380 2663,3398 2697,3398 2720,3421 2720,3453 2738,3471 2772,3471 2795,3494 2795,3526 2813,3544 2847,3544 2870,3567 2870,3599 2888,3617 2922,3617 2945,3640 2945,3672 2963,3690 2997,3690 3020,3713 3020,3745 3038,3763 3072,3763 3095,3786 3095,3818 3113,3836 3147,3836 3170,3859 3170,3891 3188,3909 3222,3909 3245,3932 3245,3964 3263,3982 3297,3982 3320,4005 3320,4037 3338,4055 3372,4055 3395,4078 3395,4110 3413,4128 3447,4128 3470,4151 3470,4183 3488,4201 3522,4201 3545,4224 3545,4256 3563,4274 3597,4274 3620,4297 3620,4329 3638,4347 3672,4347 3695,4370 3695,4402 3713,4420 3747,4420 3770,4443 3770,4475 3788,4493 3822,4493 3845,4516 3845,4548 3863,4566 3897,4566 3920,4589 3920,4621 3938,4639 3972,4639 3995,4662 3995,4694 4013,4712 4047,4712 4070,4735 4070,4767 4088,4785 4122,4785 4142,4805 4142,4837 4124,4855 4081,4855 4046,4820 4008,4820 3973,4855 3935,4855 3900,4820 3862,4820 3827,4855 3789,4855 3754,4820 3716,4820 3681,4855 3643,4855 3608,4820 3570,4820 3535,4855 3497,4855 3462,4820 3424,4820 3389,4855 3351,4855 3316,4820 3278,4820 3243,4855 3127,4855 3082,4810 3082,4616 3131,4567 3427,4567 3471,4523 3471,4470.17 3400,4399.17
  Bottom Layer w8: H2.5@1725,1550 1829,1550 2216,1937 2216,2069 v1(2135,2150)
B3: "LEFT HDR.10" P3.5 | length 6967.3
  Top Layer w8: 500,2450 424,2450 411,2437 411,2322 393,2304 337,2304 319,2322 319,2344 337,2362 337,2384 319,2402 319,2478 298,2499 264,2499 243,2478 243,2402 225,2384 225,2362 243,2344 243,2322 225,2304 225,2282 243,2264 243,2242 225,2224 225,2202 243,2184 243,2162 225,2144 160,2144 142,2162 142,2184 160,2202 160,2224 142,2242 142,2264 160,2282 160,2304 142,2322 142,2344 160,2362 160,2384 142,2402 142,2478 121,2499 87,2499 66,2478 66,2402 48,2384 48,2362 66,2344 66,2322 48,2304 48,2282 66,2264 66,2242 48,2224 48,2202 66,2184 66,2162 48,2144 48,2122 66,2104 66,2082 48,2064 48,2042 66,2024 66,2002 48,1984 48,1962 66,1944 66,1922 48,1904 48,1882 66,1864 66,1842 48,1824 48,1802 66,1784 66,1762 48,1744 48,1722 66,1704 66,1682 48,1664 48,1642 66,1624 66,1602 48,1584 48,1562 66,1544 66,1522 48,1504 48,1482 66,1464 66,1442 48,1424 48,1402 66,1384 66,1362 48,1344 48,1322 66,1304 66,1282 48,1264 48,1242 66,1224 66,1202 48,1184 48,1162 66,1144 66,1122 48,1104 48,1082 66,1064 66,1042 48,1024 48,1002 66,984 66,962 48,944 48,922 66,904 66,882 48,864 48,842 66,824 66,802 48,784 48,762 66,744 66,722 48,704 48,682 66,664 66,642 48,624 48,602 66,584 66,562 48,544 48,522 66,504 66,482 48,464 48,442 66,424 66,402 48,384 48,362 66,344 66,322 48,304 48,282 66,264 66,242 48,224 48,202 66,184 66,162 48,144 48,87 65,70 365,70 388,93 388,125 406,143 440,143 463,166 463,198 481,216 515,216 538,239 538,271 556,289 590,289 613,312 613,344 631,362 665,362 688,385 688,417 706,435 740,435 763,458 763,490 781,508 815,508 838,531 838,563 856,581 890,581 913,604 913,636 931,654 965,654 988,677 988,709 1006,727 1040,727 1063,750 1063,782 1081,800 1115,800 1138,823 1138,855 1156,873 1190,873 1213,896 1213,928 1231,946 1265,946 1288,969 1288,1001 1306,1019 1340,1019 1363,1042 1363,1074 1381,1092 1415,1092 1438,1115 1438,1147 1456,1165 1490,1165 1513,1188 1513,1220 1531,1238 1557,1238 1575,1256 1575,1500 P3.5@1525,1550
B4: "TOP HDR.18" H2.7 | length 6899.2
  Mid-Layer 1 w8: v1(2135,2050) 2094,2091 2094,2183 2111,2200 2162,2200 2180,2218 2180,2425 v1(2155,2450)
  Mid-Layer 2 w8: H2.7@1725,1650 1898,1650 2188,1940 2188,1997 v1(2135,2050)
  Bottom Layer w8: v1(2155,2450) 2155,2454 2157,2452 2235,2374 2303,2374 2422,2493 2422,2566 2537,2681 2537,2778 2567,2808 2567,2850 2594,2877 2624,2877 2645,2898 2645,2927 2620,2952 2620,2983 2645,3008 2645,3037 2620,3062 2620,3093 2645,3118 2645,3147 2620,3172 2620,3203 2645,3228 2645,3257 2620,3282 2620,3313 2645,3338 2645,3380 2663,3398 2697,3398 2720,3421 2720,3453 2738,3471 2772,3471 2795,3494 2795,3526 2813,3544 2847,3544 2870,3567 2870,3599 2888,3617 2922,3617 2945,3640 2945,3672 2963,3690 2997,3690 3020,3713 3020,3745 3038,3763 3072,3763 3095,3786 3095,3818 3113,3836 3147,3836 3170,3859 3170,3891 3188,3909 3222,3909 3245,3932 3245,3964 3263,3982 3297,3982 3320,4005 3320,4037 3338,4055 3372,4055 3395,4078 3395,4110 3413,4128 3447,4128 3470,4151 3470,4183 3488,4201 3522,4201 3545,4224 3545,4256 3563,4274 3597,4274 3620,4297 3620,4329 3638,4347 3672,4347 3695,4370 3695,4402 3713,4420 3747,4420 3770,4443 3770,4475 3788,4493 3822,4493 3845,4516 3845,4548 3863,4566 3897,4566 3920,4589 3920,4621 3938,4639 3972,4639 3995,4662 3995,4694 4013,4712 4047,4712 4070,4735 4070,4767 4088,4785 4122,4785 4142,4805 4142,4837 4124,4855 4081,4855 4046,4820 4008,4820 3973,4855 3935,4855 3900,4820 3862,4820 3827,4855 3789,4855 3754,4820 3716,4820 3681,4855 3643,4855 3608,4820 3570,4820 3535,4855 3497,4855 3462,4820 3424,4820 3389,4855 3351,4855 3316,4820 3278,4820 3243,4855 3205,4855 3140,4790 3140,4618 3191,4567 3317,4567 3350,4534 3350,4453.17 3300,4403.17 3300,4399.17
B6: "LEFT HDR.12" P3.9 | length 6889.2
  Mid-Layer 2 w8: 500,2250 446,2304 337,2304 319,2322 319,2344 337,2362 337,2384 318,2403 244,2403 225,2384 225,2362 243,2344 243,2322 225,2304 225,2282 243,2264 243,2242 225,2224 225,2202 243,2184 243,2162 225,2144 160,2144 142,2162 142,2184 160,2202 160,2224 142,2242 142,2264 160,2282 160,2304 142,2322 142,2344 160,2362 160,2384 142,2402 142,2478 121,2499 87,2499 66,2478 66,2402 48,2384 48,2362 66,2344 66,2322 48,2304 48,2282 66,2264 66,2242 48,2224 48,2202 66,2184 66,2162 48,2144 48,2122 66,2104 66,2082 48,2064 48,2042 66,2024 66,2002 48,1984 48,1962 66,1944 66,1922 48,1904 48,1882 66,1864 66,1842 48,1824 48,1802 66,1784 66,1762 48,1744 48,1722 66,1704 66,1682 48,1664 48,1642 66,1624 66,1602 48,1584 48,1562 66,1544 66,1522 48,1504 48,1482 66,1464 66,1442 48,1424 48,1402 66,1384 66,1362 48,1344 48,1322 66,1304 66,1282 48,1264 48,1242 66,1224 66,1202 48,1184 48,1162 66,1144 66,1122 48,1104 48,1082 66,1064 66,1042 48,1024 48,1002 66,984 66,962 48,944 48,922 66,904 66,882 48,864 48,842 66,824 66,802 48,784 48,762 66,744 66,722 48,704 48,682 66,664 66,642 48,624 48,602 66,584 66,562 48,544 48,522 66,504 66,482 48,464 48,442 66,424 66,402 48,384 48,362 66,344 66,322 48,304 48,282 66,264 66,242 48,224 48,202 66,184 66,162 48,144 48,87 65,70 365,70 388,93 388,125 406,143 440,143 463,166 463,198 481,216 515,216 538,239 538,271 556,289 590,289 613,312 613,344 631,362 665,362 688,385 688,417 706,435 740,435 763,458 763,490 781,508 815,508 838,531 838,563 856,581 890,581 913,604 913,636 931,654 965,654 988,677 988,709 1006,727 1040,727 1063,750 1063,782 1081,800 1115,800 1138,823 1138,855 1156,873 1190,873 1213,896 1213,928 1231,946 1265,946 1288,969 1288,1001 1306,1019 1340,1019 1363,1042 1363,1074 1381,1092 1415,1092 1438,1115 1438,1147 1456,1165 1490,1165 1513,1188 1513,1220 1531,1238 1557,1238 1575,1256 1575,1700 P3.9@1527.85,1747.15
B8: "TOP HDR.15" H2.13 | length 6981.9
  Top Layer w8: v1(1950,1950) 2001,2001 2001,2201 v1(2050,2250)
  Mid-Layer 1 w8: H2.13@1724.5,1949.5 1773,1901 1901,1901 v1(1950,1950) ; v1(2260,2484) 2264,2484 2280,2468 2362,2468 2401,2507 2401,2578 2445,2622 2445,2653 2462,2670 2493,2670 2513,2690 2513,2704 2498,2719 2498,2744 2512,2758 2512,2784 2541,2813 2541,2858 2590,2907 2590,2936 2565,2961 2565,2990 2590,3015 2590,3046 2565,3071 2565,3100 2590,3125 2590,3156 2565,3181 2565,3210 2590,3235 2590,3266 2565,3291 2565,3320 2590,3345 2590,3376 2614,3400 2614,3430 2631,3447 2660,3447 2679,3466 2679,3496 2696,3513 2725,3513 2744,3532 2744,3562 2761,3579 2790,3579 2809,3598 2809,3628 2826,3645 2855,3645 2874,3664 2874,3694 2891,3711 2920,3711 2939,3730 2939,3760 2956,3777 2985,3777 3004,3796 3004,3826 3021,3843 3050,3843 3069,3862 3069,3892 3086,3909 3115,3909 3134,3928 3134,3958 3151,3975 3180,3975 3199,3994 3199,4024 3216,4041 3245,4041 3264,4060 3264,4090 3281,4107 3310,4107 3329,4126 3329,4156 3346,4173 3375,4173 3394,4192 3394,4222 3411,4239 3440,4239 3459,4258 3459,4288 3476,4305 3505,4305 3524,4324 3524,4354 3541,4371 3570,4371 3589,4390 3589,4420 3606,4437 3635,4437 3654,4456 3654,4486 3671,4503 3700,4503 3719,4522 3719,4552 3736,4569 3765,4569 3784,4588 3784,4618 3801,4635 3830,4635 3849,4654 3849,4684 3866,4701 3900,4701 3918,4683 3938,4683 3984,4729 3984,4755 3959,4780 3926,4780 3902,4756 3861,4756 3835,4782 3801,4782 3775,4756 3745,4756 3719,4782 3685,4782 3659,4756 3629,4756 3603,4782 3569,4782 3543,4756 3513,4756 3487,4782 3453,4782 3427,4756 3397,4756 3371,4782 3337,4782 3311,4756 3281,4756 3255,4782 3221,4782 3187,4748 3187,4719 3208,4698 3208,4671 3187,4650 3187,4634 3226,4595 3273,4595 3295,4617 3317,4617 3339,4595 3354,4595 3376,4617 3398,4617 3420,4595 3441,4595 3454,4608 3454,4633 3464,4643 3503,4643 3524,4622 3524,4590 3508,4574 3508,4549 3520,4537 3520,4475 3495,4450 3495,4420 3404,4329 3071,4329 3000,4400
  Mid-Layer 2 w8: v1(2050,2250) 2074,2274 2074,2508 2090,2524 2234,2524 2265,2493 2273,2493 2264,2484 v1(2260,2484)
B9: "TOP HDR.13" H2.17 | length 6918.6
  Mid-Layer 1 w8: H2.17@1725,2150 1850,2150 v1(1950,2250)
  Bottom Layer w8: v1(1950,2250) 2050,2350 2050,2484 2116,2550 2297,2550 2475,2728 2475,2795 2515,2835 2515,2903 2490,2928 2490,2957 2515,2982 2515,3013 2490,3038 2490,3067 2515,3092 2515,3121 2490,3146 2490,3175 2515,3200 2515,3231 2490,3256 2490,3285 2515,3310 2515,3341 2490,3366 2490,3395 2515,3420 2515,3451 2490,3476 2490,3505 2515,3530 2515,3580 2542,3607 2571,3607 2590,3626 2590,3656 2607,3673 2636,3673 2655,3692 2655,3722 2672,3739 2701,3739 2720,3758 2720,3788 2737,3805 2766,3805 2785,3824 2785,3854 2802,3871 2831,3871 2850,3890 2850,3920 2867,3937 2896,3937 2915,3956 2915,3986 2932,4003 2961,4003 2980,4022 2980,4052 2997,4069 3026,4069 3045,4088 3045,4118 3062,4135 3091,4135 3110,4154 3110,4184 3127,4201 3156,4201 3175,4220 3175,4250 3192,4267 3242,4267 3264,4245 3264,4222 2548,3506 2548,3479 2566,3461 2592,3461 3369,4238 3369,4281 3348,4302 3136,4302 2955,4121 2935,4121 2922,4134 2922,4151 3043,4272 3043,4289 3025,4307 3003,4307 2914,4218 2897,4218 2886,4229 2886,4312 2876,4322 2858,4322 2851,4315 2851,4229 2839,4217 2823,4217 2811,4229 2811,4389 2800,4400
B11: "TOP HDR.11" H2.21 | length 6972.6
  Top Layer w8: v1(1850,2450) 1950,2550 2297,2550 2475,2728 2475,2795 2515,2835 2515,2903 2490,2928 2490,2957 2515,2982 2515,3013 2490,3038 2490,3067 2515,3092 2515,3121 2490,3146 2490,3175 2515,3200 2515,3231 2490,3256 2490,3285 2515,3310 2515,3341 2490,3366 2490,3395 2515,3420 2515,3451 2490,3476 2490,3505 2515,3530 2515,3580 2542,3607 2571,3607 2590,3626 2590,3656 2607,3673 2636,3673 2655,3692 2655,3722 2672,3739 2701,3739 2720,3758 2720,3788 2737,3805 2766,3805 2785,3824 2785,3854 2802,3871 2831,3871 2850,3890 2850,3920 2867,3937 2896,3937 2915,3956 2915,3986 2932,4003 2961,4003 2980,4022 2980,4052 2997,4069 3026,4069 3045,4088 3045,4118 3062,4135 3091,4135 3110,4154 3110,4184 3127,4201 3156,4201 3175,4220 3175,4250 3192,4267 3242,4267 3264,4245 3264,4222 2548,3506 2548,3479 2566,3461 2592,3461 3369,4238 3369,4281 3348,4302 3136,4302 2955,4121 2935,4121 2922,4134 2922,4151 3043,4272 3043,4289 3025,4307 3003,4307 2914,4218 2897,4218 2886,4229 2886,4312 2876,4322 2858,4322 2851,4315 2851,4229 2839,4217 2823,4217 2811,4229 2811,4314 2803,4322 2670,4322 2596,4396 2591,4401
  Mid-Layer 1 w8: H2.21@1725,2350 1835,2350 1850,2365 v1(1850,2450)
B12: "TOP HDR.9" H2.27 | length 6913.9
  Top Layer w8: H2.27@1725,2650 1926,2650 1950,2674 1950,2765 1985,2800 v1(2150,2800) ; v1(2250,2800) 2250,2739 2160,2649 2160,2625 2212,2573 2245,2573 2423,2751 2423,2872 2398,2897 2398,2926 2423,2951 2423,2982 2398,3007 2398,3036 2423,3061 2423,3092 2398,3117 2398,3146 2423,3171 2423,3200 2398,3225 2398,3254 2423,3279 2423,3310 2398,3335 2398,3364 2423,3389 2423,3420 2398,3445 2398,3474 2423,3499 2423,3530 2398,3555 2398,3584 2320,3662 2320,3787 2339,3806 2339,3831 2359,3851 2384,3851 2403,3870 2403,3895 2423,3915 2448,3915 2467,3934 2467,3959 2487,3979 2512,3979 2531,3998 2531,4023 2551,4043 2576,4043 2595,4062 2595,4087 2615,4107 2640,4107 2690,4157 2690,4175 2674,4191 2538,4191 2521,4208 2521,4225 2541,4245 2688,4245 2735,4198 2760,4198 2777,4181 2777,4157 2359,3739 2359,3713 2379,3693 2402,3693 2817,4108 2842,4108 2859,4091 2859,4067 2441,3649 2441,3623 2461,3603 2484,3603 2938,4057 2938,4078 2897,4119 2897,4151 2865,4183 2813,4183 2763,4233 2763,4269 2751,4281 2519,4281 2400,4400
  Mid-Layer 1 w8: v1(2150,2800) v1(2250,2800)
B14: "LEFT HDR.2" P3.31 | length 6910.7
  Bottom Layer w8: 500,3250 500,3243 288,3031 259,3031 243,3047 243,3075 259,3091 259,3111 243,3127 243,3155 259,3171 259,3191 243,3207 243,3235 259,3251 259,3271 243,3287 243,3315 259,3331 259,3351 243,3367 243,3395 259,3411 259,3431 243,3447 243,3475 259,3491 259,3511 243,3527 189,3527 173,3511 173,3483 189,3467 189,3447 173,3431 173,3403 189,3387 189,3367 173,3351 173,3323 189,3307 189,3287 169,3267 169,3239 185,3223 185,3203 169,3187 169,3159 185,3143 185,3123 169,3107 169,3079 185,3063 185,3043 169,3027 169,2999 185,2983 185,2955 169,2939 115,2939 99,2955 99,2983 115,2999 115,3019 99,3035 99,3063 115,3079 115,3099 99,3115 99,3143 115,3159 115,3179 99,3195 99,3223 115,3239 115,3259 99,3275 99,3303 115,3319 115,3339 99,3355 99,3383 115,3399 115,3419 99,3435 99,3463 115,3479 115,3499 99,3515 99,3543 115,3559 115,3579 99,3595 99,3623 115,3639 115,3659 99,3675 99,3703 115,3719 115,3739 99,3755 99,3783 115,3799 115,3819 99,3835 99,3863 115,3879 115,3899 99,3915 99,3943 115,3959 115,3979 99,3995 99,4023 115,4039 115,4059 99,4075 99,4103 115,4119 115,4139 99,4155 99,4183 115,4199 115,4219 99,4235 99,4263 115,4279 115,4299 99,4315 99,4343 115,4359 115,4379 99,4395 99,4423 115,4439 115,4459 99,4475 99,4503 115,4519 115,4539 99,4555 99,4583 115,4599 115,4619 99,4635 99,4663 113,4677 148,4677 170,4655 170,4627 188,4609 216,4609 238,4587 238,4559 256,4541 284,4541 306,4519 306,4491 324,4473 352,4473 374,4451 374,4423 392,4405 420,4405 442,4383 442,4355 460,4337 488,4337 510,4315 510,4287 528,4269 556,4269 578,4247 578,4219 596,4201 624,4201 646,4179 646,4151 664,4133 692,4133 714,4111 714,4083 732,4065 760,4065 782,4043 782,4015 800,3997 828,3997 850,3975 850,3947 868,3929 896,3929 918,3907 918,3879 936,3861 964,3861 986,3839 986,3811 1004,3793 1187,3793 1214,3820 1280,3820 1371,3729 1371,3632 1152,3413 1152,3235 1188,3199 1455,3199 1475,3179 1475,2900 P3.31@1525,2850
B16: "TOP HDR.5" H2.35 | length 7026.3
  Mid-Layer 1 w8: H2.35@1725,3050 1902,3227 v1(1902,3398)
  Bottom Layer w8: v1(1902,3398) 2028,3398 2058,3428 2058,3802 1985,3875 1707,3875 1517,4065 1517,4141 1563,4187 2075,4187 2105,4157 2105,3956 2217,3844 2268,3844 2502,4078 2502,4153 2364,4291 1460,4291 1317,4434 1301,4434 1289,4422 1289,4405 1477,4217 1477,4202 1463,4188 1451,4188 1200,4439 1185,4439 1169,4423 1169,4406 1421,4154 1421,4141 1406,4126 1391,4126 1133,4384 1133,4445 1165,4477 1374,4477 1405,4446 1405,4398 1470,4333 1933,4333 2000,4400
C5: "LEFT HDR.11" P3.7 | length 6958.5
  Mid-Layer 1 w8: 500,2350 454,2304 337,2304 319,2322 319,2344 337,2362 337,2384 319,2402 319,2478 298,2499 264,2499 243,2478 243,2402 225,2384 225,2362 243,2344 243,2322 225,2304 225,2282 243,2264 243,2242 225,2224 225,2202 243,2184 243,2162 225,2144 160,2144 142,2162 142,2184 160,2202 160,2224 142,2242 142,2264 160,2282 160,2304 142,2322 142,2344 160,2362 160,2384 142,2402 142,2478 121,2499 87,2499 66,2478 66,2402 48,2384 48,2362 66,2344 66,2322 48,2304 48,2282 66,2264 66,2242 48,2224 48,2202 66,2184 66,2162 48,2144 48,2122 66,2104 66,2082 48,2064 48,2042 66,2024 66,2002 48,1984 48,1962 66,1944 66,1922 48,1904 48,1882 66,1864 66,1842 48,1824 48,1802 66,1784 66,1762 48,1744 48,1722 66,1704 66,1682 48,1664 48,1642 66,1624 66,1602 48,1584 48,1562 66,1544 66,1522 48,1504 48,1482 66,1464 66,1442 48,1424 48,1402 66,1384 66,1362 48,1344 48,1322 66,1304 66,1282 48,1264 48,1242 66,1224 66,1202 48,1184 48,1162 66,1144 66,1122 48,1104 48,1082 66,1064 66,1042 48,1024 48,1002 66,984 66,962 48,944 48,922 66,904 66,882 48,864 48,842 66,824 66,802 48,784 48,762 66,744 66,722 48,704 48,682 66,664 66,642 48,624 48,602 66,584 66,562 48,544 48,522 66,504 66,482 48,464 48,442 66,424 66,402 48,384 48,362 66,344 66,322 48,304 48,282 66,264 66,242 48,224 48,202 66,184 66,162 48,144 48,87 65,70 365,70 388,93 388,125 406,143 440,143 463,166 463,198 481,216 515,216 538,239 538,271 556,289 590,289 613,312 613,344 631,362 665,362 688,385 688,417 706,435 740,435 763,458 763,490 781,508 815,508 838,531 838,563 856,581 890,581 913,604 913,636 931,654 965,654 988,677 988,709 1006,727 1040,727 1063,750 1063,782 1081,800 1115,800 1138,823 1138,855 1156,873 1190,873 1213,896 1213,928 1231,946 1265,946 1288,969 1288,1001 1306,1019 1340,1019 1363,1042 1363,1074 1381,1092 1415,1092 1438,1115 1438,1147 1456,1165 1490,1165 1513,1188 1513,1220 1531,1238 1557,1238 1575,1256 1575,1600 P3.7@1525,1650
C6: "TOP HDR.27" H2.10 | length 6975.7
  Mid-Layer 2 w8: H2.10@1625,1750 1675,1700 1675,1523 1697,1501 1826,1501 2249,1924 2249,2151 2362,2264 2362,2347 2475,2460 2475,2543 2596,2664 2596,2747 2717,2868 2717,3245 4370,4898 4370,4927 4344,4953 2778,4953 2700,4875 2700,4500
C7: "TOP HDR.16" H2.11 | length 6933.1
  Top Layer w8: H2.11@1725,1850 1986,1850 v1(1988,1852)
  Mid-Layer 2 w8: v1(2050,2150) 2061,2150 2111,2200 2162,2200 2180,2218 2180,2279 2200,2299 2238,2299 2274,2335 2274,2388 2309,2423 2309,2451 2326,2468 2362,2468 2401,2507 2401,2578 2445,2622 2445,2653 2462,2670 2493,2670 2513,2690 2513,2704 2498,2719 2498,2744 2512,2758 2512,2784 2541,2813 2541,2858 2590,2907 2590,2936 2565,2961 2565,2990 2590,3015 2590,3046 2565,3071 2565,3100 2590,3125 2590,3156 2565,3181 2565,3210 2590,3235 2590,3266 2565,3291 2565,3320 2590,3345 2590,3376 2614,3400 2614,3430 2631,3447 2660,3447 2679,3466 2679,3496 2696,3513 2725,3513 2744,3532 2744,3562 2761,3579 2790,3579 2809,3598 2809,3628 2826,3645 2855,3645 2874,3664 2874,3694 2891,3711 2920,3711 2939,3730 2939,3760 2956,3777 2985,3777 3004,3796 3004,3826 3021,3843 3050,3843 3069,3862 3069,3892 3086,3909 3115,3909 3134,3928 3134,3958 3151,3975 3180,3975 3199,3994 3199,4024 3216,4041 3245,4041 3264,4060 3264,4090 3281,4107 3310,4107 3329,4126 3329,4156 3346,4173 3375,4173 3394,4192 3394,4222 3411,4239 3440,4239 3459,4258 3459,4288 3476,4305 3505,4305 3524,4324 3524,4354 3541,4371 3570,4371 3589,4390 3589,4420 3606,4437 3635,4437 3654,4456 3654,4486 3671,4503 3700,4503 3719,4522 3719,4552 3736,4569 3765,4569 3784,4588 3784,4618 3801,4635 3830,4635 3849,4654 3849,4684 3866,4701 3900,4701 3918,4683 3938,4683 3984,4729 3984,4755 3959,4780 3926,4780 3902,4756 3861,4756 3835,4782 3801,4782 3775,4756 3745,4756 3719,4782 3685,4782 3659,4756 3629,4756 3603,4782 3569,4782 3543,4756 3513,4756 3487,4782 3453,4782 3427,4756 3397,4756 3371,4782 3337,4782 3311,4756 3281,4756 3255,4782 3221,4782 3187,4748 3187,4719 3204,4702 3276,4702 3289,4689 3289,4667 3274,4652 3225,4652 3209,4636 3209,4612 3226,4595 3273,4595 3295,4617 3317,4617 3339,4595 3354,4595 3376,4617 3398,4617 3420,4595 3441,4595 3454,4608 3454,4633 3464,4643 3503,4643 3524,4622 3524,4590 3508,4574 3508,4549 3520,4537 3520,4475 3495,4450 3495,4420 3404,4329 3170.17,4329 3100,4399.17
  Bottom Layer w8: v1(1988,1852) 2050,1914 v1(2050,1950) 2094,1994 2094,2106 v1(2050,2150)
C8: "LEFT HDR.24" P3.14 | length 6971.9
  Top Layer w8: 600,1950 754,1950 782,1922 782,1182 767,1167 745,1167 730,1182 730,1567 715,1582 693,1582 678,1567 678,1059 697,1040 731,1040 754,1063 754,1088 772,1106 806,1106 829,1129 829,1161 847,1179 881,1179 904,1202 904,1227 922,1245 956,1245 979,1268 979,1300 997,1318 1031,1318 1054,1341 1054,1366 1072,1384 1106,1384 1129,1407 1129,1439 1147,1457 1181,1457 1204,1480 1238,1480 1257,1461 1257,1427 1199,1369 1199,1337 1176,1314 1142,1314 1124,1296 1124,1271 1101,1248 1067,1248 1049,1230 1049,1198 1026,1175 992,1175 974,1157 974,1132 952,1110 918,1110 899,1091 899,1059 876,1036 842,1036 824,1018 824,993 802,971 768,971 750,953 750,921 726,897 692,897 674,879 674,854 656,836 631,836 612,855 612,908 593,927 568,927 549,908 549,708 531,690 506,690 487,709 487,909 468,928 443,928 424,909 424,579 448,555 481,555 556,630 556,662 574,680 608,680 631,703 631,735 649,753 683,753 706,776 706,808 724,826 765,826 781,842 781,874 799,892 833,892 856,915 856,947 874,965 908,965 931,988 931,1020 949,1038 983,1038 1006,1061 1006,1093 1024,1111 1058,1111 1081,1134 1081,1166 1099,1184 1133,1184 1156,1207 1156,1239 1174,1257 1208,1257 1231,1280 1231,1312 1249,1330 1283,1330 1306,1353 1306,1831 P3.14@1425,1950
C9: "LEFT HDR.26" P3.18 | length 6928.4
  Mid-Layer 2 w8: 600,2150 782,1968 782,1357 771,1346 742,1346 730,1358 730,1567 715,1582 693,1582 678,1567 678,1059 697,1040 731,1040 754,1063 754,1088 772,1106 806,1106 829,1129 829,1161 847,1179 881,1179 904,1202 904,1227 922,1245 956,1245 979,1268 979,1300 997,1318 1031,1318 1054,1341 1054,1366 1072,1384 1106,1384 1129,1407 1129,1439 1147,1457 1181,1457 1204,1480 1238,1480 1257,1461 1257,1427 1199,1369 1199,1337 1176,1314 1142,1314 1124,1296 1124,1271 1101,1248 1067,1248 1049,1230 1049,1198 1026,1175 992,1175 974,1157 974,1132 952,1110 918,1110 899,1091 899,1059 876,1036 842,1036 824,1018 824,993 802,971 768,971 750,953 750,921 726,897 692,897 674,879 674,854 656,836 631,836 612,855 612,908 593,927 568,927 549,908 549,708 531,690 506,690 487,709 487,909 468,928 443,928 424,909 424,579 448,555 481,555 556,630 556,662 574,680 608,680 631,703 631,735 649,753 683,753 706,776 706,808 724,826 765,826 781,842 781,874 799,892 833,892 856,915 856,947 874,965 908,965 931,988 931,1020 949,1038 983,1038 1006,1061 1006,1093 1024,1111 1058,1111 1081,1134 1081,1166 1099,1184 1133,1184 1156,1207 1156,1239 1174,1257 1208,1257 1231,1280 1231,1312 1249,1330 1283,1330 1306,1353 1306,2033 P3.18@1424,2151
C10: "LEFT HDR.17" P3.19 | length 6903.6
  Bottom Layer w8: 499.17,1750 305.17,1944 266,1944 248,1926 248,1904 266,1886 266,1864 245,1843 198,1843 177,1864 177,1886 195,1904 195,1926 177,1944 177,1966 195,1984 195,2006 177,2024 177,2046 156,2067 135,2067 114,2046 114,2024 96,2006 96,1984 114,1966 114,1944 96,1926 96,1904 114,1886 114,1864 96,1846 96,1824 114,1806 114,1784 96,1766 96,1744 114,1726 114,1704 96,1686 96,1664 114,1646 114,1624 96,1606 96,1584 114,1566 114,1544 96,1526 96,1504 114,1486 114,1464 96,1446 96,1424 114,1406 114,1384 96,1366 96,1344 114,1326 114,1304 96,1286 96,1264 114,1246 114,1224 96,1206 96,1184 114,1166 114,1144 96,1126 96,1104 114,1086 114,1064 96,1046 96,1024 114,1006 114,984 96,966 96,944 114,926 114,904 96,886 96,864 114,846 114,824 96,806 96,784 114,766 114,744 96,726 96,704 114,686 114,664 96,646 96,624 114,606 114,584 96,566 96,544 114,526 114,504 96,486 96,464 114,446 114,424 96,406 96,384 114,366 114,344 96,326 96,304 114,286 281,286 295,272 295,257 281,243 115,243 101,229 101,214 115,200 282,200 296,186 296,171 282,157 115,157 101,143 101,128 115,114 293,114 352,173 352,205 370,223 404,223 427,246 427,278 445,296 479,296 502,319 502,351 520,369 554,369 577,392 577,424 595,442 629,442 652,465 652,497 670,515 704,515 727,538 727,570 745,588 779,588 802,611 802,643 820,661 854,661 877,684 877,716 895,734 929,734 952,757 952,789 970,807 1004,807 1027,830 1027,862 1045,880 1079,880 1102,903 1102,935 1120,953 1154,953 1177,976 1177,1008 1195,1026 1229,1026 1252,1049 1252,1081 1270,1099 1304,1099 1327,1122 1327,1154 1345,1172 1379,1172 1402,1195 1402,1227 1420,1245 1454,1245 1475,1266 1475,2200 P3.19@1525,2250
C11: "TOP HDR.20" H2.26 | length 6951.3
  Mid-Layer 1 w8: H2.26@1625,2550 1674,2501 2175,2501 2208,2468 2208,2254 2220,2242 2256,2242 2305,2291 2305,2376 2422,2493 2422,2566 2537,2681 2537,2778 2567,2808 2567,2850 2594,2877 2624,2877 2645,2898 2645,2927 2620,2952 2620,2983 2645,3008 2645,3037 2620,3062 2620,3093 2645,3118 2645,3147 2620,3172 2620,3203 2645,3228 2645,3257 2620,3282 2620,3313 2645,3338 2645,3380 2663,3398 2697,3398 2720,3421 2720,3453 2738,3471 2772,3471 2795,3494 2795,3526 2813,3544 2847,3544 2870,3567 2870,3599 2888,3617 2922,3617 2945,3640 2945,3672 2963,3690 2997,3690 3020,3713 3020,3745 3038,3763 3072,3763 3095,3786 3095,3818 3113,3836 3147,3836 3170,3859 3170,3891 3188,3909 3222,3909 3245,3932 3245,3964 3263,3982 3297,3982 3320,4005 3320,4037 3338,4055 3372,4055 3395,4078 3395,4110 3413,4128 3447,4128 3470,4151 3470,4183 3488,4201 3522,4201 3545,4224 3545,4256 3563,4274 3597,4274 3620,4297 3620,4329 3638,4347 3672,4347 3695,4370 3695,4402 3713,4420 3747,4420 3770,4443 3770,4475 3788,4493 3822,4493 3845,4516 3845,4548 3863,4566 3897,4566 3920,4589 3920,4621 3938,4639 3972,4639 3995,4662 3995,4694 4013,4712 4047,4712 4070,4735 4070,4767 4088,4785 4122,4785 4142,4805 4142,4837 4124,4855 4081,4855 4046,4820 4008,4820 3973,4855 3935,4855 3900,4820 3862,4820 3827,4855 3789,4855 3754,4820 3716,4820 3681,4855 3643,4855 3608,4820 3570,4820 3535,4855 3497,4855 3462,4820 3424,4820 3389,4855 3351,4855 3316,4820 3278,4820 3243,4855 3205,4855 3170,4820 3132,4820 3097,4855 3059,4855 3024,4820 3007,4820 2968,4859 2951,4859 2935,4843 2935,4620 3001,4554 3346,4554 3400,4500
C12: "LEFT HDR.30" P3.28 | length 6997.9
  Bottom Layer w8: 600,2550 649,2599 649,2799 700,2850 841,2850 878,2887 878,2966 923,3011 985,3011 1086,2910 1153,2910 1209,2854 1209,2670 1228,2651 1250,2651 1269,2670 1269,2917 1235,2951 1104,2951 876,3179 876,3443 865,3454 839,3454 828,3443 828,2944 815,2931 790,2931 778,2943 778,3471 797,3490 909,3490 982,3563 982,3592 973,3601 910,3601 836,3527 775,3527 738,3490 738,2940 729,2931 706,2931 697,2940 697,3542 715,3560 812,3560 891,3639 1070,3639 1081,3628 1081,3603 937,3459 937,3178 1114,3001 1317,3001 1348,2970 1348,2727 P3.28@1425,2650